# Allegro board NVR.brd
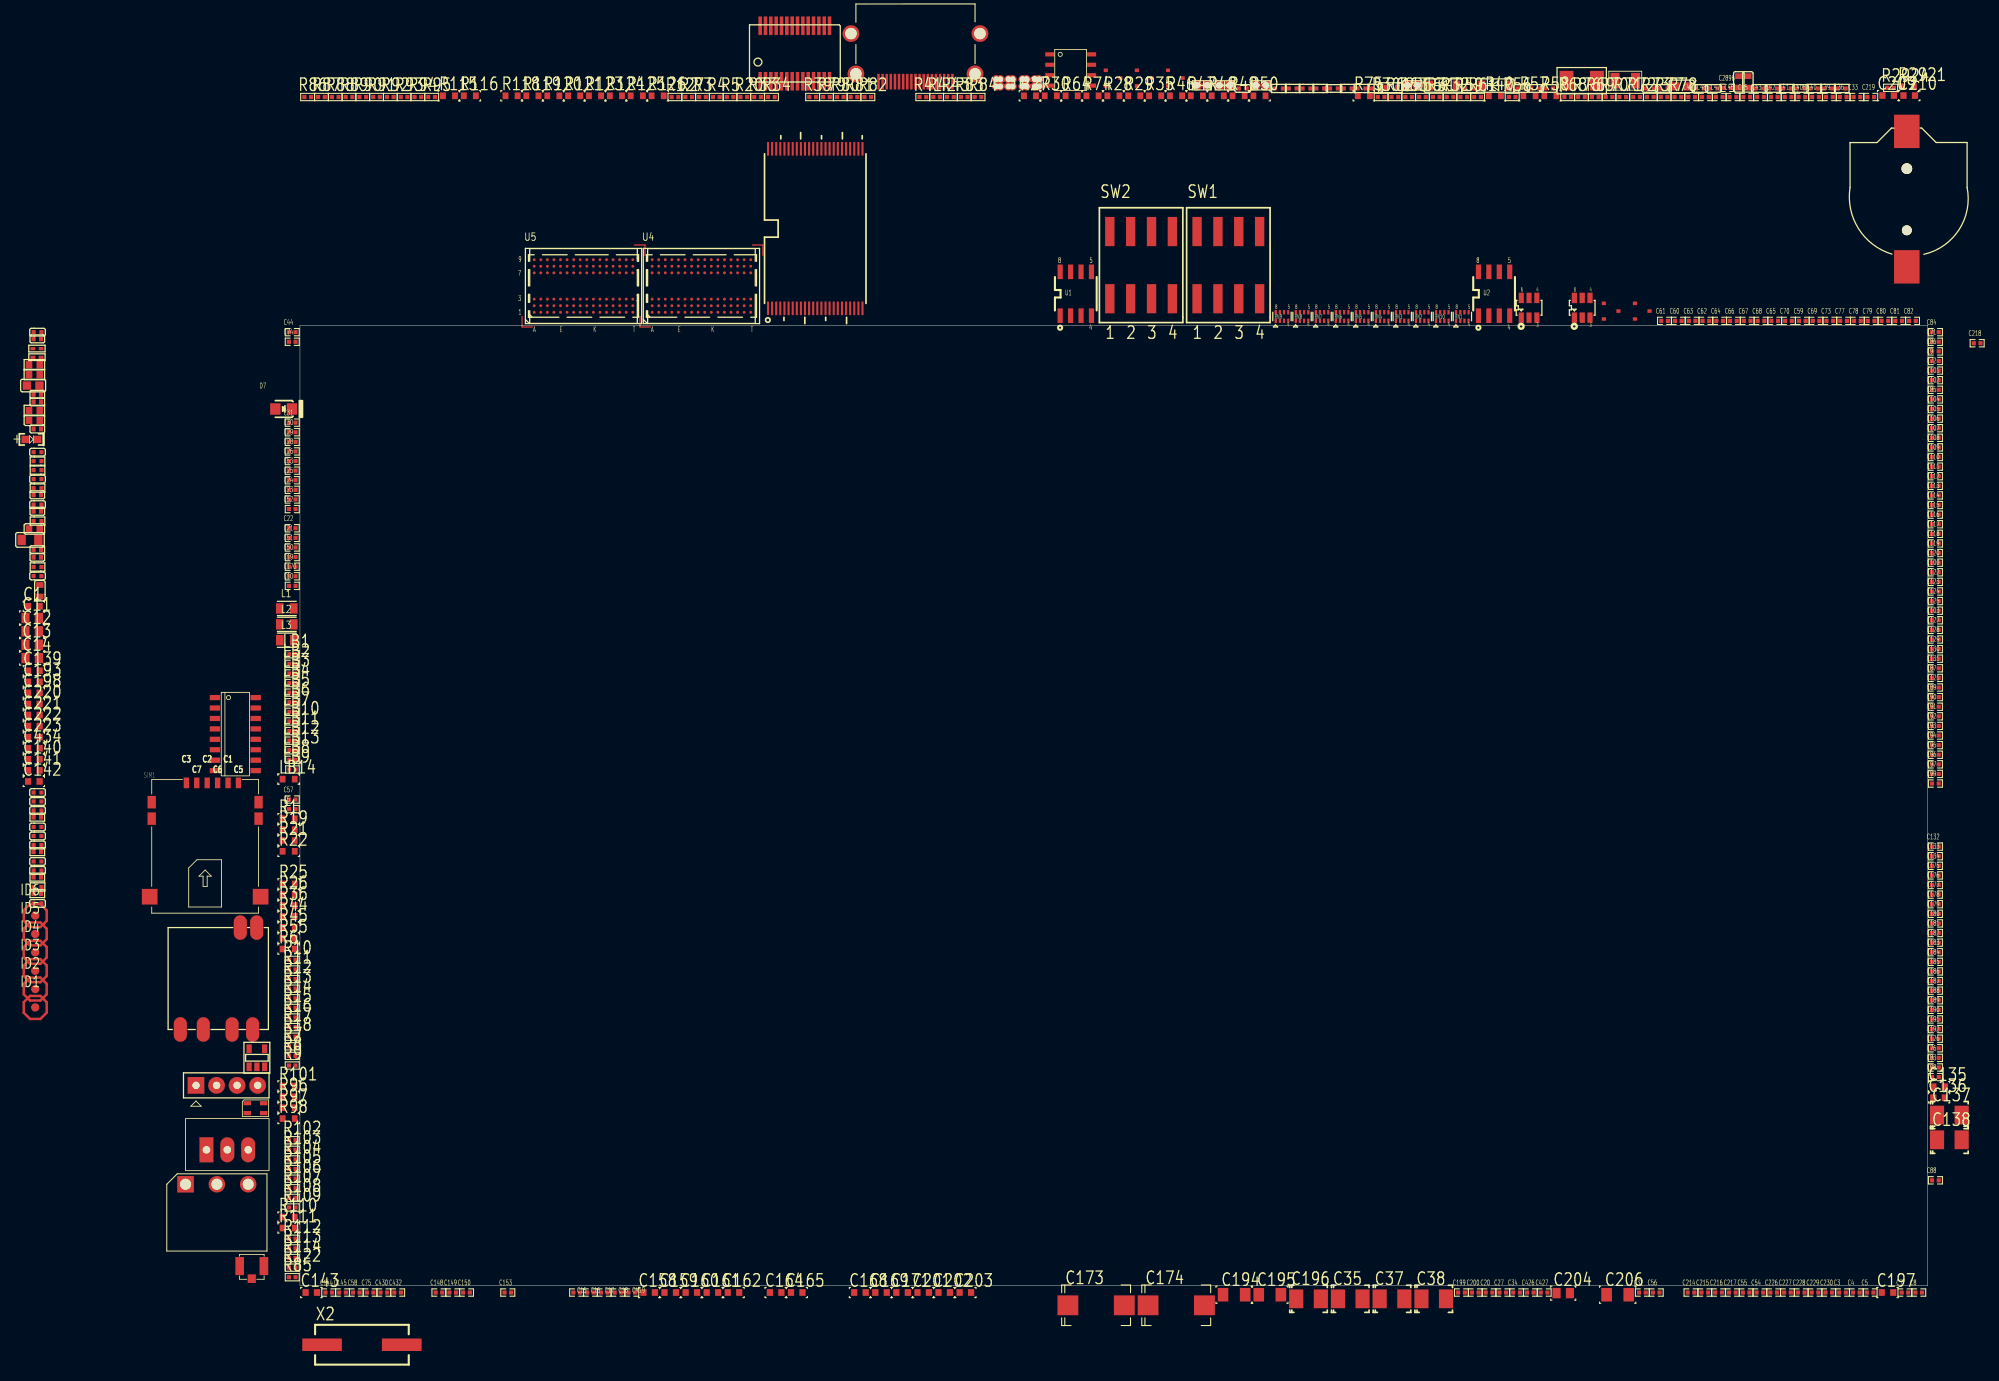
[diagram p0: board, top side]
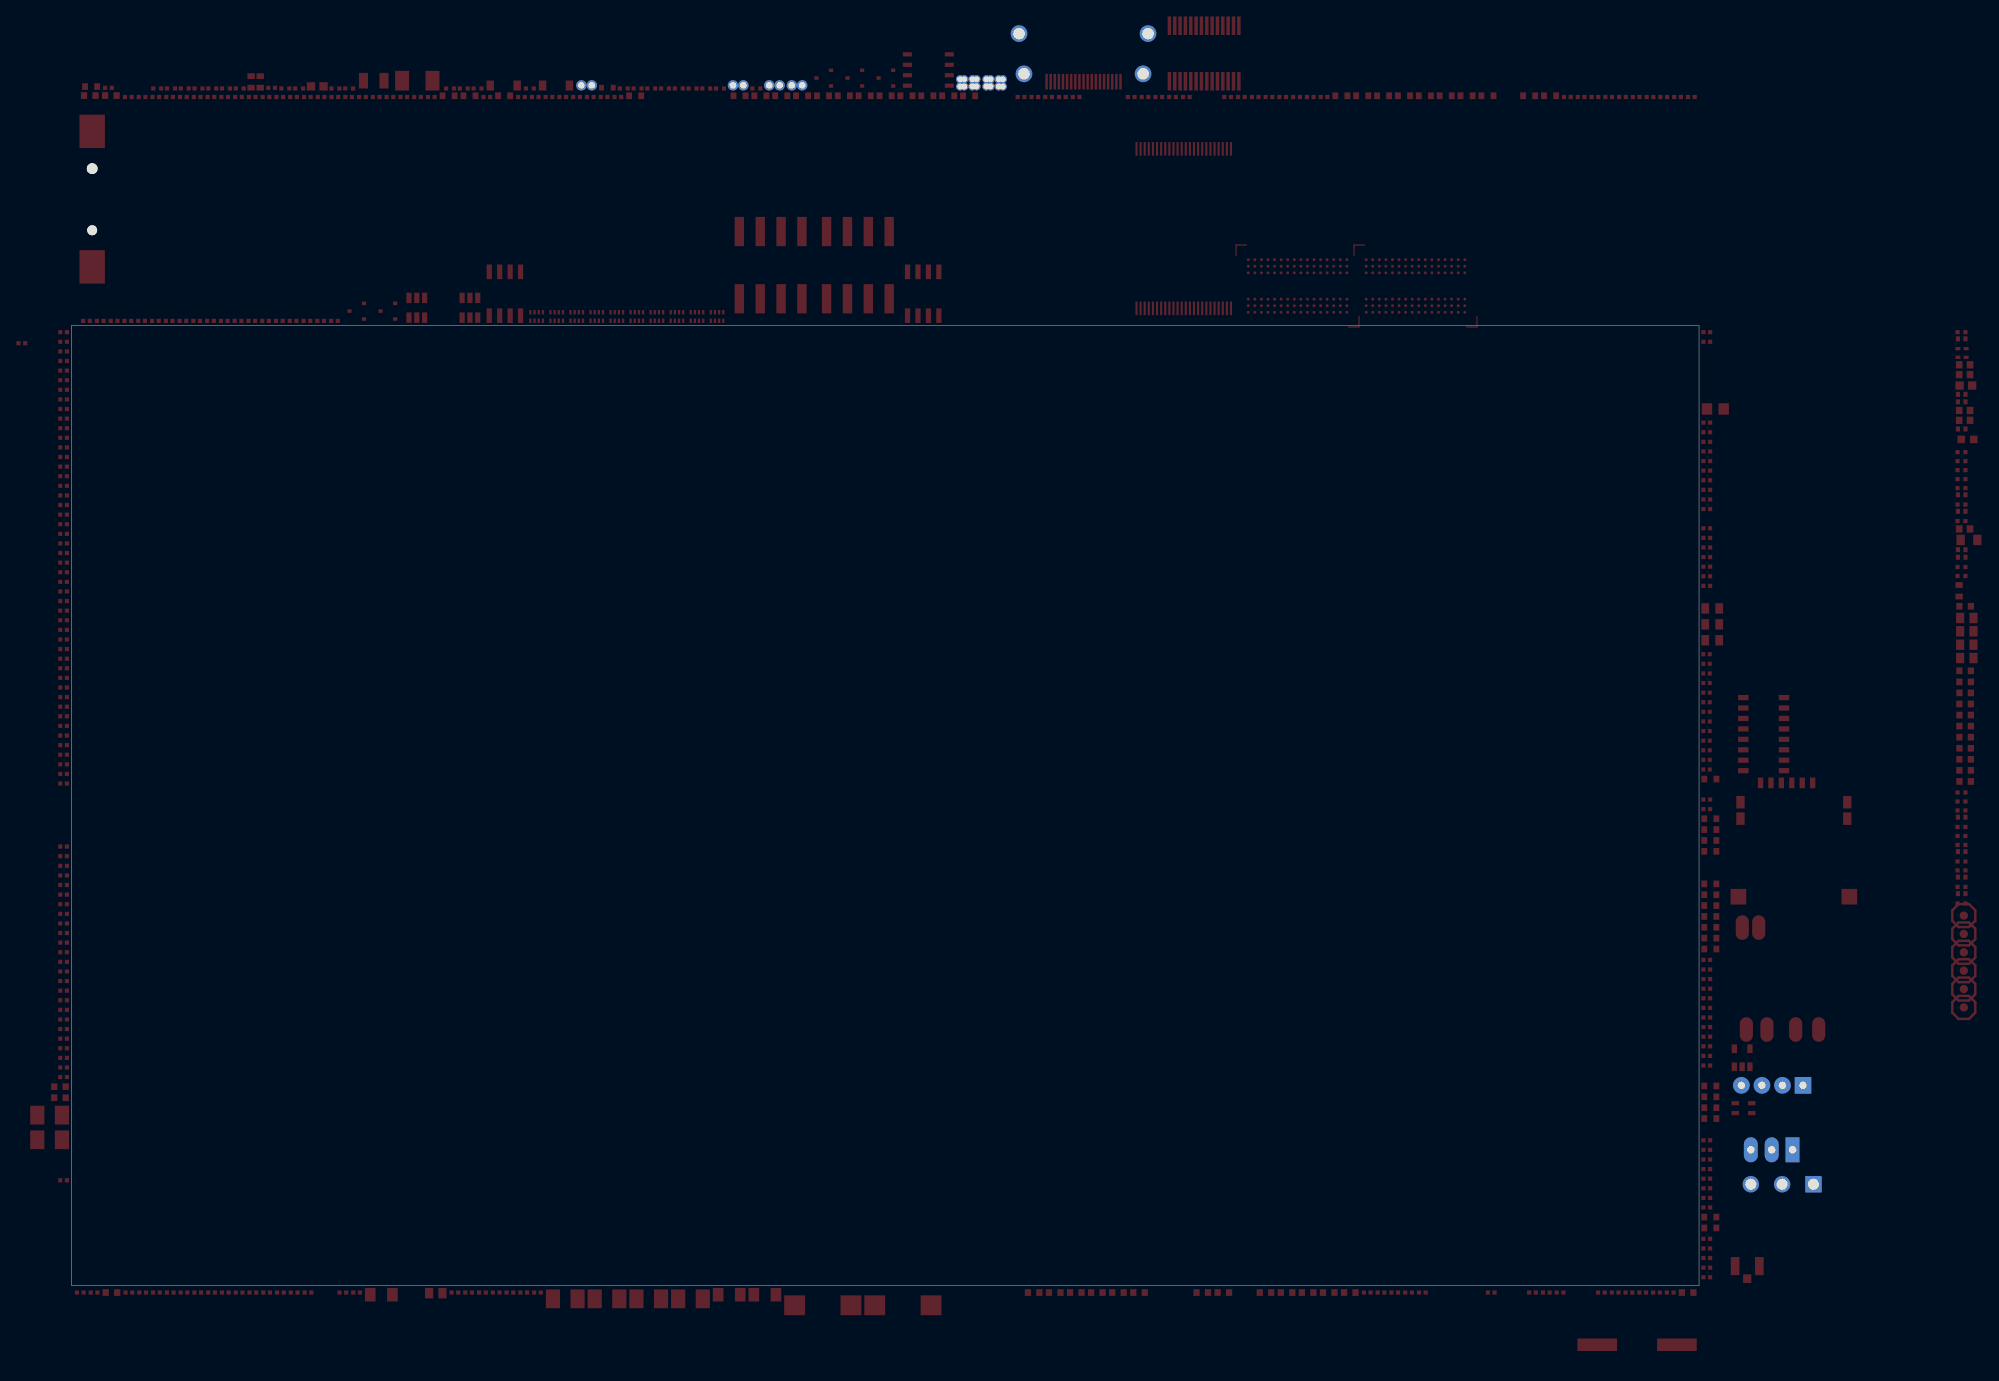
[diagram p1: board, bottom side, seen from below]

Outline 198.12 x 116.84 mm; copper layers: TOP, BOTTOM. Coordinates in mm from the lower left corner of the outline.
Outline path: 0,116.84 198.12,116.84 198.12,0 0,0 0,116.84

## Design rules (mm)
net group USB_D1: nets HUB_DM2 HUB_DP2
net group USB_HOST: nets USB2_DM0 USB2_DP0

## Placement (name value [footprint] x y rotation side)
BT1  BAT_3V  [BAT_CR1220]  195.58 132.08 0 top
C1  1NF  [SC0603]  -32.39 82.65 0 top
C3  220NF  [SC0402]  187.76 -0.84 0 top
C4  220NF  [SC0402]  189.43 -0.84 0 top
C5  220NF  [SC0402]  191.11 -0.84 0 top
C6  220NF  [SC0402]  -0.94 57.97 0 top
C7  220NF  [SC0402]  195.35 -0.84 0 top
C8  220NF  [SC0402]  197.03 -0.84 0 top
C9  100NF  [SC0402]  199.06 112.5 0 top
C10  100NF  [SC0402]  -0.94 85.13 0 top
C11  10UF  [SC0805]  -32.59 81.23 0 top
C12  10UF  [SC0805]  -32.59 79.6 0 top
C13  10UF  [SC0805]  -32.59 77.98 0 top
C14  10UF  [SC0805]  -32.59 76.35 0 top
C15  2.2UF  [HSC0402]  33.68 -0.84 0 top
C16  2.2UF  [HSC0402]  35.36 -0.84 0 top
C17  2.2UF  [HSC0402]  37.03 -0.84 0 top
C18  2.2UF  [HSC0402]  38.71 -0.84 0 top
C19  100NF  [SC0402]  -0.94 87.47 0 top
C20  100NF  [SC0402]  144.73 -0.84 0 top
C21  100NF  [SC0402]  -0.94 90.98 0 top
C22  100NF  [SC0402]  -0.94 92.14 0 top
C23  100NF  [SC0402]  -0.94 95.65 0 top
C24  100NF  [SC0402]  -0.94 96.82 0 top
C25  100NF  [SC0402]  -0.94 97.99 0 top
C26  100NF  [SC0402]  -0.94 100.32 0 top
C27  100NF  [SC0402]  146.41 -0.84 0 top
C28  100NF  [SC0402]  -0.94 101.49 0 top
C29  100NF  [SC0402]  -0.94 102.66 0 top
C30  100NF  [SC0402]  -0.94 103.83 0 top
C31  100NF  [SC0402]  -0.94 105 0 top
C32  100NF  [SC0402]  163.4 -0.84 0 top
C33  100NF  [SC0402]  189.51 144.61 0 top
C34  100NF  [SC0402]  148.08 -0.84 0 top
C35  100UF  [STC3528]  127.84 -1.6 0 top
C36  100NF  [SC0402]  187.83 144.61 0 top
C37  100UF  [STC3528]  132.92 -1.6 0 top
C38  100UF  [STC3528]  138 -1.6 0 top
C39  100NF  [SC0402]  186.16 144.61 0 top
C40  100NF  [SC0402]  184.48 144.61 0 top
C41  100NF  [SC0402]  181.13 144.61 0 top
C42  100NF  [SC0402]  179.45 144.61 0 top
C43  100NF  [SC0402]  177.77 144.61 0 top
C44  22PF  [SC0402]  -0.94 116 0 top
C45  100NF  [SC0402]  176.1 144.61 0 top
C46  100NF  [SC0402]  174.42 144.61 0 top
C47  100NF  [SC0402]  172.75 144.61 0 top
C48  100NF  [SC0402]  171.07 144.61 0 top
C49  100NF  [SC0402]  169.39 144.61 0 top
C50  100NF  [SC0402]  -0.94 88.64 0 top
C51  100NF  [SC0402]  -0.94 89.81 0 top
C52  100NF  [SC0402]  -0.94 94.48 0 top
C53  100NF  [SC0402]  -0.94 99.15 0 top
C54  100NF  [SC0402]  177.7 -0.84 0 top
C55  100NF  [SC0402]  176.02 -0.84 0 top
C56  100NF  [SC0402]  165.07 -0.84 0 top
C57  100NF  [SC0402]  -0.94 59.14 0 top
C58  100NF  [SC0402]  6.86 -0.84 0 top
C59  100NF  [SC0402]  182.86 117.37 0 top
C60  100NF  [SC0402]  167.77 117.37 0 top
C61  100NF  [SC0402]  166.09 117.37 0 top
C62  100NF  [SC0402]  171.12 117.37 0 top
C63  100NF  [SC0402]  169.45 117.37 0 top
C64  100NF  [SC0402]  172.8 117.37 0 top
C65  100NF  [SC0402]  179.5 117.37 0 top
C66  100NF  [SC0402]  174.48 117.37 0 top
C67  100NF  [SC0402]  176.15 117.37 0 top
C68  100NF  [SC0402]  177.83 117.37 0 top
C69  100NF  [SC0402]  184.53 117.37 0 top
C70  100NF  [SC0402]  181.18 117.37 0 top
C71  100NF  [SC0402]  199.06 114.83 0 top
C72  100NF  [SC0402]  199.06 111.33 0 top
C73  100NF  [SC0402]  186.21 117.37 0 top
C74  22PF  [SC0402]  -0.94 114.83 0 top
C75  1UF  [SC0402]  8.53 -0.84 0 top
C76  1UF  [SC0402]  199.06 27.71 0 top
C77  100NF  [SC0402]  187.89 117.37 0 top
C78  100NF  [SC0402]  189.56 117.37 0 top
C79  100NF  [SC0402]  191.24 117.37 0 top
C80  100NF  [SC0402]  192.92 117.37 0 top
C81  100NF  [SC0402]  194.59 117.37 0 top
C82  100NF  [SC0402]  196.27 117.37 0 top
C83  1UF  [SC0402]  199.06 26.54 0 top
C84  100NF  [SC0402]  199.06 116 0 top
C85  100NF  [SC0402]  199.06 107.82 0 top
C86  100NF  [SC0402]  199.06 113.66 0 top
C87  100NF  [SC0402]  199.06 73.94 0 top
C88  100NF  [SC0402]  199.06 12.81 0 top
C89  100NF  [SC0402]  199.06 71.6 0 top
C90  100NF  [SC0402]  199.06 70.43 0 top
C91  100NF  [SC0402]  199.06 69.27 0 top
C92  100NF  [SC0402]  199.06 68.1 0 top
C93  100NF  [SC0402]  199.06 66.93 0 top
C94  100NF  [SC0402]  199.06 65.76 0 top
C95  100NF  [SC0402]  199.06 64.59 0 top
C96  100NF  [SC0402]  199.06 63.42 0 top
C97  100NF  [SC0402]  199.06 62.26 0 top
C98  1UF  [SC0402]  199.06 25.37 0 top
C99  100NF  [SC0402]  199.06 61.09 0 top
C100  100NF  [SC0402]  199.06 86.79 0 top
C101  100NF  [SC0402]  199.06 110.16 0 top
C102  100NF  [SC0402]  199.06 108.99 0 top
C103  100NF  [SC0402]  199.06 80.95 0 top
C104  100NF  [SC0402]  199.06 106.65 0 top
C105  100NF  [SC0402]  199.06 105.49 0 top
C106  100NF  [SC0402]  199.06 104.32 0 top
C107  100NF  [SC0402]  199.06 103.15 0 top
C108  100NF  [SC0402]  199.06 101.98 0 top
C109  100NF  [SC0402]  199.06 100.81 0 top
C110  100NF  [SC0402]  199.06 99.64 0 top
C111  100NF  [SC0402]  199.06 98.48 0 top
C112  100NF  [SC0402]  199.06 97.31 0 top
C113  100NF  [SC0402]  199.06 96.14 0 top
C114  100NF  [SC0402]  199.06 94.97 0 top
C115  100NF  [SC0402]  199.06 93.8 0 top
C116  100NF  [SC0402]  199.06 92.63 0 top
C117  100NF  [SC0402]  199.06 91.47 0 top
C118  100NF  [SC0402]  199.06 90.3 0 top
C119  100NF  [SC0402]  199.06 89.13 0 top
C120  100NF  [SC0402]  199.06 87.96 0 top
C121  100NF  [SC0402]  199.06 72.77 0 top
C122  100NF  [SC0402]  199.06 85.62 0 top
C123  100NF  [SC0402]  199.06 84.45 0 top
C124  100NF  [SC0402]  199.06 83.29 0 top
C125  100NF  [SC0402]  199.06 82.12 0 top
C126  100NF  [SC0402]  199.06 28.88 0 top
C127  100NF  [SC0402]  199.06 79.78 0 top
C128  100NF  [SC0402]  199.06 78.61 0 top
C129  100NF  [SC0402]  199.06 77.44 0 top
C130  100NF  [SC0402]  199.06 76.28 0 top
C131  100NF  [SC0402]  199.06 75.11 0 top
C132  1UF  [SC0402]  199.06 53.42 0 top
C133  1UF  [SC0402]  199.06 52.25 0 top
C134  1UF  [SC0402]  199.06 51.08 0 top
C135  27PF  [SC0603]  199.5 24.21 0 top
C136  27PF  [SC0603]  199.5 22.86 0 top
C137  220UF  [STC3528]  200.76 20.75 0 top
C138  220UF  [STC3528]  200.76 17.75 0 top
C139  10UF  [SC0603]  -32.39 74.8 0 top
C140  2.2UF  [SC0603]  -32.39 64.03 0 top
C141  2.2UF  [SC0603]  -32.39 62.69 0 top
C142  2.2UF  [SC0603]  -32.39 61.34 0 top
C143  2.2UF  [SC0603]  1.38 -0.84 0 top
C144  100NF  [SC0402]  3.51 -0.84 0 top
C145  100NF  [SC0402]  5.18 -0.84 0 top
C148  10NF  [SC0402]  16.92 -0.84 0 top
C149  10NF  [SC0402]  18.59 -0.84 0 top
C150  10NF  [SC0402]  20.27 -0.84 0 top
C153  10NF  [SC0402]  25.3 -0.84 0 top
C158  100NF  [SC0603]  42.51 -0.84 0 top
C159  100NF  [SC0603]  45.07 -0.84 0 top
C160  100NF  [SC0603]  47.64 -0.84 0 top
C161  100NF  [SC0603]  50.2 -0.84 0 top
C162  100NF  [SC0603]  52.77 -0.84 0 top
C164  100NF  [SC0603]  57.9 -0.84 0 top
C165  100NF  [SC0603]  60.46 -0.84 0 top
C168  100NF  [SC0603]  68.16 -0.84 0 top
C169  100NF  [SC0603]  70.73 -0.84 0 top
C170  100NF  [SC0402]  -0.94 86.3 0 top
C171  10UF  [SC0603]  73.29 -0.84 0 top
C173  100UF  [STC7343]  96.9 -2.39 0 top
C174  100UF  [STC7343]  106.65 -2.39 0 top
C175  1UF  [SC0402]  199.06 49.91 0 top
C176  1UF  [SC0402]  199.06 48.74 0 top
C177  1UF  [SC0402]  199.06 47.57 0 top
C178  1UF  [SC0402]  199.06 46.41 0 top
C179  1UF  [SC0402]  199.06 45.24 0 top
C180  1UF  [SC0402]  199.06 44.07 0 top
C181  1UF  [SC0402]  199.06 42.9 0 top
C182  1UF  [SC0402]  199.06 41.73 0 top
C183  1UF  [SC0402]  199.06 40.56 0 top
C184  1UF  [SC0402]  199.06 39.4 0 top
C185  1UF  [SC0402]  199.06 38.23 0 top
C186  1UF  [SC0402]  199.06 37.06 0 top
C187  1UF  [SC0402]  199.06 35.89 0 top
C188  1UF  [SC0402]  199.06 34.72 0 top
C189  1UF  [SC0402]  199.06 33.55 0 top
C190  1UF  [SC0402]  199.06 32.39 0 top
C191  1UF  [SC0402]  199.06 31.22 0 top
C192  1UF  [SC0402]  199.06 30.05 0 top
C193  10UF  [SC0603]  -32.39 73.46 0 top
C194  22UF  [SC1206]  113.7 -1.1 0 top
C195  22UF  [SC1206]  118.05 -1.1 0 top
C196  100UF  [STC3528]  122.76 -1.6 0 top
C197  10UF  [SC0603]  193.23 -0.84 0 top
C198  10UF  [SC0603]  -32.39 72.11 0 top
C199  1NF  [SC0402]  141.38 -0.84 0 top
C200  1NF  [SC0402]  143.05 -0.84 0 top
C201  10UF  [SC0603]  75.86 -0.84 0 top
C202  10UF  [SC0603]  78.42 -0.84 0 top
C203  10UF  [SC0603]  80.99 -0.84 0 top
C204  10UF  [SC0805]  153.76 -0.91 0 top
C206  4.7UF  [SC1206]  160.39 -1.1 0 top
C209  10NF  [SC0603]  193.31 144.79 0 top
C210  10NF  [SC0603]  195.87 144.79 0 top
C214  15PF  [SC0402]  169.32 -0.84 0 top
C215  15PF  [SC0402]  170.99 -0.84 0 top
C216  15PF  [SC0402]  172.67 -0.84 0 top
C217  15PF  [SC0402]  174.35 -0.84 0 top
C218  15PF  [SC0402]  204.14 114.66 0 top
C219  15PF  [SC0402]  191.19 144.61 0 top
C220  10UF  [SC0603]  -32.39 70.77 0 top
C221  10UF  [SC0603]  -32.39 69.42 0 top
C222  10UF  [SC0603]  -32.39 68.07 0 top
C223  10UF  [SC0603]  -32.39 66.73 0 top
C224  0.1uF  [C0402]  -31.94 116 0 top
C226  10PF  [SC0402]  179.37 -0.84 0 top
C227  10PF  [SC0402]  181.05 -0.84 0 top
C228  10PF  [SC0402]  182.73 -0.84 0 top
C229  470NF  [SC0402]  184.4 -0.84 0 top
C230  470NF  [SC0402]  186.08 -0.84 0 top
C408  100NF  [SC0402]  182.8 144.61 0 top
C419  2.2UF  [HSC0402]  40.39 -0.84 0 top
C426  100NF  [SC0402]  149.76 -0.84 0 top
C427  100NF  [SC0402]  151.43 -0.84 0 top
C430  100NF  [SC0402]  10.21 -0.84 0 top
C432  100NF  [SC0402]  11.89 -0.84 0 top
C434  10UF  [SC0603]  -32.39 65.38 0 top
C1980  1uF  [C0402]  164.3 145.65 0 top
C1993  0.1uF  [C0402]  -31.94 46.5 0 top
C2035  0.1uF  [C0402]  -31.94 55.8 0 top
C2036  8pF  [C0402]  182.64 145.65 0 top
C2037  8pF  [C0402]  177.62 145.65 0 top
C2038  4.7uF  [C0603]  176.23 146.45 0 top
C2039  0.1uF  [C0402]  172.06 145.65 0 top
C2040  0.1uF  [C0402]  170.39 145.65 0 top
C2041  0.1uF  [C0402]  152.02 145.65 0 top
C2044  1uF  [C0402]  165.97 145.65 0 top
C2046  0.1uF  [C0402]  -31.94 57.81 0 top
C2049  0.1uF  [C0402]  -31.94 58.9 0 top
C2050  1uF  [C0402]  -31.94 60 0 top
C2051  4.7uF  [C0603]  -31.66 84.54 0 top
C2052  0.1uF  [C0402]  -31.94 86.33 0 top
C2053  8pF  [C0402]  148.67 145.65 0 top
C2054  8pF  [C0402]  125.85 145.65 0 top
C2094  1U  [C0402]  -31.94 98.12 0 top
C2095  1U  [C0402]  -31.94 101.4 0 top
C2096  1U  [C0402]  -31.94 50.51 0 top
C2097  1U  [C0402]  -31.94 53.62 0 top
C2173  1U  [C0402]  -31.94 54.71 0 top
C2174  22uF  [C0805]  -32.86 90.73 0 top
C2175  matching circuit, will be determined  [C0402]  -31.94 95.02 0 top
C2176  matching circuit, will be determined  [C0402]  -31.94 51.61 0 top
C2177  0.1uF  [SMC0402]  -31.97 96.22 0 top
C2178  10uF/6.3V  [SMC0603]  -32.33 92.06 0 top
C2179  33pF  [SMC0402]  -31.97 104.22 0 top
C2180  0.1uF  [SMC0402]  -31.97 108.44 0 top
C2181  0.1uF  [SMC0402]  -31.97 88.62 0 top
C2182  10uF/6.3V  [SMC0603]  -32.33 105.28 0 top
C2183  33pF  [SMC0402]  -31.97 94.21 0 top
C2184  0.1uF  [SMC0402]  -31.97 115.19 0 top
C2185  0.1uF  [SMC0402]  -31.97 89.54 0 top
C2186  33pF  [SMC0402]  -31.97 107.53 0 top
C2187  0.1uF  [C0402]  114.74 145.65 0 top
C2896  100NF  [SC0402]  173.74 145.73 0 top
C2897  1uF  [C0402]  179.29 145.65 0 top
C2898  0.1uF  [C0402]  150.35 145.65 0 top
C2899  4.7uF  [C0603]  175.13 146.45 0 top
D2  1N5819  [SOD123]  145.49 146.01 0 top
D4  NC/1N5819  [SOD123]  139.12 146.01 0 top
D7  LED  [SD0805-LED]  -1.98 106.66 0 top
D49  1N4148  [SOD523]  132.87 145.75 0 top
ED15  NC/ESD9B5VL  [E0402N]  135.41 146.03 0 top
ED16  NC/ESD9B5VL  [E0402N]  116.95 146.03 0 top
ED17  NC/ESD9B5VL  [E0402N]  112.54 146.03 0 top
ED18  NC/ESD9B5VL  [E0402N]  109.79 146.03 0 top
ESD811  ES0402V014BT  [ESD0402]  -32.01 112.96 0 top
ESD812  ES0402V014BT  [ESD0402]  -32.01 114.01 0 top
FB3  BLM18PG181SN1  [L0603]  168.18 145.9 0 top
FB5  BLM18PG181SN1  [L0603]  -32.48 109.51 0 top
FB10  31/3A-L3  [SMR0603]  -32.33 112.03 0 top
FB1605  31/3A-L3  [SMR0603]  -32.33 106.47 0 top
FB1606  31/3A-L3  [SMR0603]  -32.33 110.84 0 top
ID1  -  [ID-BOARD]  -32.22 33.85 0 top
ID2  -  [ID-BOARD]  -32.22 36.08 0 top
ID3  -  [ID-BOARD]  -32.22 38.32 0 top
ID4  -  [ID-BOARD]  -32.22 40.55 0 top
ID5  -  [ID-BOARD]  -32.22 42.79 0 top
ID6  -  [ID-BOARD]  -32.22 45.03 0 top
J21  CON3  [ANTENNA_WIFI]  -5.86 2.38 0 top
J0701  DEBUG  [CONN3_BOX]  -10.11 16.53 0 top
J0702  691322310003  [PHEONIX_CONN_3]  -13.92 12.34 0 top
J1851  HEADER 4 2.54mm /NC  [HEADER-4]  -12.65 24.37 0 top
J1852  10029449-111RLF  [HDMI_A]  70.42 146.48 0 top
L1  100NH  [SL0805B]  -1.6 82.39 0 top
L2  100NH  [SL0805B]  -1.6 80.46 0 top
L3  100NH  [SL0805B]  -1.6 78.52 0 top
L14  matching circuit,will be determined  [R0402]  -31.94 93.02 0 top
LB1  LB  [SL0402]  -0.91 76.82 0 top
LB2  LB  [SL0402]  -0.91 75.65 0 top
LB3  LB  [SL0402]  -0.91 74.48 0 top
LB4  LB  [SL0402]  -0.91 73.31 0 top
LB5  LB  [SL0402]  -0.91 72.15 0 top
LB6  LB  [SL0402]  -0.91 70.98 0 top
LB7  LB  [SL0402]  -0.91 69.81 0 top
LB8  LB  [SL0402]  -0.91 63.97 0 top
LB9  LB  [SL0402]  -0.91 62.8 0 top
LB10  LB  [SL0402]  -0.91 68.64 0 top
LB11  LB  [SL0402]  -0.91 67.47 0 top
LB12  LB  [SL0402]  -0.91 66.3 0 top
LB13  LB  [SL0402]  -0.91 65.13 0 top
LB14  LB  [SL0603]  -1.37 61.63 0 top
LED1  LED0603-G  [SM0603LED_AC]  -32.68 102.95 0 top
Q2  FETN-GSD  [SOT23]  159.59 118.57 0 top
Q3  FETN-GSD  [SOT23]  163.38 118.57 0 top
Q6  WNM2021/2SK3018  [SOT23]  106.54 146.92 0 top
Q7  WNM2021/2SK3018  [SOT23]  102.76 146.92 0 top
Q8  NC/WNM2021/2SK3018  [SOT23]  98.97 146.92 0 top
R1  10K  [SR0603]  -1.37 56.8 0 top
R2  120  [SR0402]  47.32 144.61 0 top
R3  120  [SR0402]  49 144.61 0 top
R4  120  [SR0402]  50.67 144.61 0 top
R5  120  [SR0402]  52.35 144.61 0 top
R6  10K  [SR0603]  -1.37 40.95 0 top
R7  33  [SR0402]  -0.94 29.12 0 top
R8  33  [SR0402]  -0.94 27.95 0 top
R9  33  [SR0402]  -0.94 26.78 0 top
R10  33  [SR0402]  -0.94 39.63 0 top
R11  33  [SR0402]  -0.94 38.46 0 top
R12  33  [SR0402]  -0.94 37.3 0 top
R13  33  [SR0402]  -0.94 36.13 0 top
R14  33  [SR0402]  -0.94 34.96 0 top
R15  33  [SR0402]  -0.94 33.79 0 top
R16  33  [SR0402]  -0.94 32.62 0 top
R17  33  [SR0402]  -0.94 31.45 0 top
R18  33  [SR0402]  -0.94 30.29 0 top
R19  10K  [SR0603]  -1.37 55.48 0 top
R20  1K  [SR0402]  54.03 144.61 0 top
R21  10K  [SR0603]  -1.37 54.16 0 top
R22  10K  [SR0603]  -1.37 52.84 0 top
R25  10K  [SR0603]  -1.37 48.88 0 top
R26  10K  [SR0603]  -1.37 47.56 0 top
R27  4.7K/NC  [SR0603]  88.85 144.76 0 top
R28  4.7K  [SR0603]  99.01 144.76 0 top
R29  4.7K  [SR0603]  101.55 144.76 0 top
R30  4.7K/NC  [SR0603]  91.39 144.76 0 top
R31  0  [SR0402]  138.3 144.61 0 top
R32  0  [SR0402]  139.98 144.61 0 top
R33  1K  [SR0402]  55.7 144.61 0 top
R34  1K  [SR0402]  57.38 144.61 0 top
R35  4.7K  [SR0603]  104.09 144.76 0 top
R36  10K  [SR0603]  -1.37 46.24 0 top
R39  1K  [SR0402]  62.41 144.61 0 top
R40  1.13K  [SR0603]  145.44 144.76 0 top
R41  10K  [SR0402]  75.82 144.61 0 top
R42  10K  [SR0402]  77.5 144.61 0 top
R43  10K  [SR0402]  79.17 144.61 0 top
R44  10K  [SR0603]  -1.37 44.92 0 top
R45  10K  [SR0603]  -1.37 43.6 0 top
R46  4.7K  [SR0603]  106.63 144.76 0 top
R47  4.7K  [SR0603]  109.17 144.76 0 top
R48  4.7K  [SR0603]  111.71 144.76 0 top
R49  4.7K  [SR0603]  114.25 144.76 0 top
R50  4.7K  [SR0603]  116.79 144.76 0 top
R55  10K  [SR0603]  -1.37 42.27 0 top
R56  1MEG  [SR0402]  147.55 144.61 0 top
R57  270  [SR0603]  149.66 144.76 0 top
R58  270  [SR0603]  152.2 144.76 0 top
R59  0  [SR0402]  141.66 144.61 0 top
R61  0  [SR0402]  143.33 144.61 0 top
R62  75  [SR0402]  133.27 144.61 0 top
R63  75  [SR0402]  134.95 144.61 0 top
R64  4.7K/NC  [SR0603]  93.93 144.76 0 top
R66  75  [SR0402]  136.63 144.61 0 top
R68  33K/NC  [SR0402]  154.31 144.61 0 top
R69  10K  [SR0402]  157.66 144.61 0 top
R70  20K  [SR0402]  159.33 144.61 0 top
R71  240  [SR0402]  161.01 144.61 0 top
R72  240  [SR0402]  162.69 144.61 0 top
R73  240  [SR0402]  164.36 144.61 0 top
R74  4.7K/NC  [SR0603]  96.47 144.76 0 top
R75  4.7K  [SR0603]  129.49 144.76 0 top
R76  33K/NC  [SR0402]  155.98 144.61 0 top
R77  4.7K  [SR0402]  166.04 144.61 0 top
R78  470K  [SR0402]  167.72 144.61 0 top
R79  1K  [SR0402]  64.08 144.61 0 top
R80  1K  [SR0402]  65.76 144.61 0 top
R81  1K  [SR0402]  67.44 144.61 0 top
R82  1K  [SR0402]  69.11 144.61 0 top
R83  10K  [SR0402]  80.85 144.61 0 top
R84  10K  [SR0402]  82.52 144.61 0 top
R85  22  [SR0402]  -0.94 1.03 0 top
R86  22  [SR0402]  0.94 144.61 0 top
R87  22  [SR0402]  2.62 144.61 0 top
R88  22  [SR0402]  4.29 144.61 0 top
R89  22  [SR0402]  5.97 144.61 0 top
R90  22  [SR0402]  7.65 144.61 0 top
R91  22  [SR0402]  9.32 144.61 0 top
R92  22  [SR0402]  11 144.61 0 top
R93  22  [SR0402]  12.67 144.61 0 top
R94  22  [SR0402]  14.35 144.61 0 top
R95  22  [SR0402]  16.03 144.61 0 top
R96  100K  [SR0603]  -1.37 22.97 0 top
R97  100K  [SR0603]  -1.37 21.65 0 top
R98  100K  [SR0603]  -1.37 20.33 0 top
R101  100K  [SR0603]  -1.37 24.29 0 top
R102  1K  [SR0402]  -0.94 17.69 0 top
R103  1K  [SR0402]  -0.94 16.52 0 top
R104  1K  [SR0402]  -0.94 15.35 0 top
R105  1K  [SR0402]  -0.94 14.18 0 top
R106  1K  [SR0402]  -0.94 13.01 0 top
R107  1K  [SR0402]  -0.94 11.85 0 top
R108  1K  [SR0402]  -0.94 10.68 0 top
R109  1K  [SR0402]  -0.94 9.51 0 top
R110  2K  [SR0603]  -1.37 8.34 0 top
R111  2K  [SR0603]  -1.37 7.02 0 top
R112  22  [SR0402]  -0.94 5.7 0 top
R113  22  [SR0402]  -0.94 4.53 0 top
R114  22  [SR0402]  -0.94 3.36 0 top
R115  0/NC  [SR0603]  18.14 144.76 0 top
R116  0/NC  [SR0603]  20.68 144.76 0 top
R118  0  [SR0603]  25.76 144.76 0 top
R119  0  [SR0603]  28.3 144.76 0 top
R120  0  [SR0603]  30.84 144.76 0 top
R121  0  [SR0603]  33.38 144.76 0 top
R122  22  [SR0402]  -0.94 2.19 0 top
R123  1K  [SR0603]  35.92 144.76 0 top
R124  1K  [SR0603]  38.46 144.76 0 top
R125  200  [SR0603]  41 144.76 0 top
R126  200  [SR0603]  43.54 144.76 0 top
R127  10  [SR0402]  45.64 144.61 0 top
R301  75  [SR0402]  131.6 144.61 0 top
R2290  10K  [R0402]  120.83 145.65 0 top
R2291  10K  [R0402]  -31.94 100.31 0 top
R2321  0R  [R0402]  -31.94 99.22 0 top
R2375  0R  [R0402]  -31.94 48.51 0 top
R2376  0R  [R0402]  -31.94 97.03 0 top
R2377  10K  [R0402]  119.16 145.65 0 top
R2378  100K  [R0402]  124.18 145.65 0 top
R2379  10K  [R0402]  122.51 145.65 0 top
R2380  10K  [R0402]  185.99 145.65 0 top
R2385  0R/NC  [R0402]  -31.94 87.43 0 top
R2386  0R  [SMR0402]  -31.97 52.8 0 top
R2387  0R/NM  [SMR0402]  -31.97 49.7 0 top
R2388  0R/NM  [SMR0402]  -31.97 57 0 top
R2389  240R  [SMR0402]  -31.97 47.69 0 top
R2917  1.62K%1  [R0402]  127.53 145.65 0 top
R2918  1.62K%1  [R0402]  129.2 145.65 0 top
R2919  1.62K%1  [R0402]  130.87 145.65 0 top
R2920  1.62K%1  [R0402]  187.66 145.65 0 top
R2921  0/NC  [SR0603]  195.71 145.88 0 top
R2922  NC/10K  [R0402]  180.97 145.65 0 top
R2923  NC/10K  [R0402]  184.31 145.65 0 top
R2924  47K  [SR0402]  193.6 145.73 0 top
R2925  680R  [R0402]  142.31 145.65 0 top
RN1  33  [SRN8-0804]  141.48 117.91 0 top
RN2  33  [SRN8-0804]  136.6 117.91 0 top
RN3  33  [SRN8-0804]  134.16 117.91 0 top
RN4  33  [SRN8-0804]  131.72 117.91 0 top
RN5  33  [SRN8-0804]  129.29 117.91 0 top
RN6  33  [SRN8-0804]  126.85 117.91 0 top
RN7  33  [SRN8-0804]  124.41 117.91 0 top
RN8  33  [SRN8-0804]  121.97 117.91 0 top
RN9  33  [SRN8-0804]  119.53 117.91 0 top
RN10  33  [SRN8-0804]  139.04 117.91 0 top
SIM1  CR-201-6P  [MICRO_SIM]  -11.29 54.82 0 top
SW1  DSW4  [SDSW8-L]  113 124.16 0 top
SW2  DSW4  [SDSW8-L]  102.38 124.16 0 top
T2  DLW21SN900SQ2L  [CHOKE_COIL]  -5.41 21.79 0 top
U1  MIC2505  [SOP8-50-150]  94.43 120.68 0 top
U2  MIC2505  [SOP8-50-150]  145.34 120.68 0 top
U4  DDR3 DRAM-4GBIT-800MHZ-16BIT  [BGA96-32-1609G]  48.87 121.62 0 top
U5  DDR3 DRAM-4GBIT-800MHZ-16BIT  [BGA96-32-1609G]  34.51 121.62 0 top
U8  AZC199-04S  [SOT23-6L]  149.6 118.97 0 top
U10  H27U2G8F2CTR_BC  [SOP48-20-720A]  62.72 128.6 0 top
U16  AZC199-04S  [SOT23-6L]  156.07 118.97 0 top
U26  PT5108E23E-33/RT9013-33B  [SOT23-5]  -5.24 27.73 0 top
U28  RL-UM12BS-8188EUS  [WIFI_BT_R]  -9.56 37.36 0 top
U81  MCP7940M-I/SN  [SOIC-8]  93.81 147.9 0 top
U83  MAX3232  [SOIC16]  -7.87 67.1 0 top
U90  NC/RClamp0524PA/ESD5304/TPD4E02B04DQAR  [SLP2510P8]  88.94 146.33 0 top
U91  NC/RClamp0524PA/ESD5304/TPD4E02B04DQAR  [SLP2510P8]  85.74 146.33 0 top
U92  GL850G  [SSOP28]  60.24 149.9 0 top
X2  24MHZ  [SX2-1205]  7.54 -7.19 0 top
X3  12M/20pF  [5032-12M]  156.01 146.6 0 top
Y6  32.768K  [CM315D]  161.31 146.6 0 top

## Library data of the parts
BT1 = CON2
C1 C3-C19 C21-C26 C28-C33 C36 C39-C86 C98 C132-C136 C139-C145 C148-C150 C153 C158-C162 C164 C165 C168-C171 C175-C195 C197-C204 C206 C209 C210 C214-C223 C226-C230 C408 C419 C430 C432 C434 C2094-C2097 C2173 C2896 = C
C20 C27 C34 C87-C97 C99-C131 C426 C427 = C: alternate symbols: ((T:SC0402;B:SC0402,SC0402-BGA,SC0402-BGA-A))
C35 C37 C38 C137 C138 C173 C174 C196 = CP
C224 C1980 C1993 C2035 C2046 C2051-C2054 C2174 = CAP NP
C2036 C2037 C2039-C2041 C2898 = CAPACITOR
C2038 C2897 C2899 = CAPACITOR_0
C2044 C2050 = CAP NP: room: USB+5V
C2049 = CAP NP_4
C2175 C2176 = C0603
C2177 C2180 C2181 C2185 = CAPC-SM0402_10: tolerance: 10%
C2178 C2182 = CAPC-SM0805_0
C2179 C2183 C2184 C2186 = CAPC-SM0402_4: room: ROOM10
C2187 = CAP NP_2
D2 D4 = DIODE: room: CHG
D7 = LED
D49 = DIODE_0
ED15-ED18 = TVS
ESD811 ESD812 = ESD,ES0402V014BT_2
FB3 FB5 = INDUCTOR
FB10 FB1605 FB1606 = FB0603_0: room: ROOM9
ID1-ID6 = ID-BOARD
J21 = CON3
J0701 J0702 = HEADER 3
J1851 = HEADER 4
J1852 = HDMI_A
L1-L3 = L
L14 = INDUCTOR_0
LB1-LB14 = LB
LED1 = LED_LTST-C150GKT_0
Q2 Q3 = FETN-GSD
Q6-Q8 = MOSFET N
R1-R22 R25-R36 R39-R50 R55-R59 R61-R64 R66 R68-R71 R74-R98 R101 R110-R116 R118-R127 R301 R2921 R2924 = R
R72 R73 R102-R109 = R: alternate symbols: ((T:SR0402;B:SR0402,SR0402-BGA))
R2290 = RESISTOR_4
R2291 R2321 R2375 R2376 R2386-R2389 = RES-SM0402_2
R2377-R2379 R2385 R2917-R2920 R2922 R2923 R2925 = RESISTOR
R2380 = RESISTOR_1
RN1-RN10 = RND8-4
SIM1 = SIM_RIDER_2
SW1 SW2 = DSW4
T2 = TRNSFMR 67115100_0
U1 U2 = MIC2505
U4 U5 = MT41J64M16LA-15E_0
U8 U16 = AZC199-04S
U10 = MT29F2G08ABAEAWP_0
U26 = DS8008_4
U28 = WM-294_0
U81 = LM4990_0
U83 = MAX3232_1: Tolerance: ***; User Part Number: ***
U90 = DS8008_1
U91 = DS8008_2
U92 = GLI8024-48_3
X2 = X3
X3 Y6 = CRYSTAL DIP DT38 R_2.A

## Footprints (pads in the part's own frame, mm; a bottom-side part is the same pattern mirrored in y, then rotated)
5032-12M
  rect 1.7x2.4 smd: 1(-1.85,0) 2(1.85,0)
ANTENNA_WIFI
  rect 1.05x2.2 smd: 1(-1.475,0) 2(1.475,0)
  rect 1x1.05 smd: 3(0,-1.525)
BAT_CR1220
  round 1.3 hole 1.3 unplated: (0,3.815)
  round 1.2 hole 1.2 unplated: (0,-3.685)
  rect 3.099x4.064 smd: 1(0,8.348) 2(0,-8.134)
BGA96-32-1609G
  round 0.356 smd: A1(-6,-3.2) A2(-6,-2.4) A3(-6,-1.6) A7(-6,1.6) A8(-6,2.4) A9(-6,3.2) B1(-5.2,-3.2) B2(-5.2,-2.4) B3(-5.2,-1.6) B7(-5.2,1.6) B8(-5.2,2.4) B9(-5.2,3.2) C1(-4.4,-3.2) C2(-4.4,-2.4) C3(-4.4,-1.6) C7(-4.4,1.6) C8(-4.4,2.4) C9(-4.4,3.2) D1(-3.6,-3.2) D2(-3.6,-2.4) D3(-3.6,-1.6) D7(-3.6,1.6) D8(-3.6,2.4) D9(-3.6,3.2) E1(-2.8,-3.2) E2(-2.8,-2.4) E3(-2.8,-1.6) E7(-2.8,1.6) E8(-2.8,2.4) E9(-2.8,3.2) F1(-2,-3.2) F2(-2,-2.4) F3(-2,-1.6) F7(-2,1.6) F8(-2,2.4) F9(-2,3.2) G1(-1.2,-3.2) G2(-1.2,-2.4) G3(-1.2,-1.6) G7(-1.2,1.6) G8(-1.2,2.4) G9(-1.2,3.2) H1(-0.4,-3.2) H2(-0.4,-2.4) H3(-0.4,-1.6) H7(-0.4,1.6) H8(-0.4,2.4) H9(-0.4,3.2) J1(0.4,-3.2) J2(0.4,-2.4) J3(0.4,-1.6) J7(0.4,1.6) J8(0.4,2.4) J9(0.4,3.2) K1(1.2,-3.2) K2(1.2,-2.4) K3(1.2,-1.6) K7(1.2,1.6) K8(1.2,2.4) K9(1.2,3.2) L1(2,-3.2) L2(2,-2.4) L3(2,-1.6) L7(2,1.6) L8(2,2.4) L9(2,3.2) M1(2.8,-3.2) M2(2.8,-2.4) M3(2.8,-1.6) M7(2.8,1.6) M8(2.8,2.4) M9(2.8,3.2) N1(3.6,-3.2) N2(3.6,-2.4) N3(3.6,-1.6) N7(3.6,1.6) N8(3.6,2.4) N9(3.6,3.2) P1(4.4,-3.2) P2(4.4,-2.4) P3(4.4,-1.6) P7(4.4,1.6) P8(4.4,2.4) P9(4.4,3.2) R1(5.2,-3.2) R2(5.2,-2.4) R3(5.2,-1.6) R7(5.2,1.6) R8(5.2,2.4) R9(5.2,3.2) T1(6,-3.2) T2(6,-2.4) T3(6,-1.6) T7(6,1.6) T8(6,2.4) T9(6,3.2)
C0402
  rect 0.51x0.51 smd: 1(-0.48,0) 2(0.48,0)
C0603
  rect 0.9x0.7 smd: 1(0,0.7) 2(0,-0.7)
C0805
  rect 1.016x1.27 smd: 1(-1.016,0) 2(1.016,0)
CHOKE_COIL
  rect 0.914x0.508 smd: 1(-1,0.4) 2(1,0.4) 3(1,-0.8) 4(-1,-0.8)
CM315D
  rect 1.1x1.9 smd: 1(-1.25,0) 2(1.25,0)
CONN3_BOX
  rect 1.7x3.048 hole 0.9: 1(-1.27,0)
  oval 1.7x3.048 hole 0.9: 2(1.27,0) 3(3.81,0)
E0402N
  oval 1.27x1.27 hole 0.8: 1(-0.635,0) 2(0.635,0)
ESD0402
  custom 0.6x0.4 smd: 1(-0.495,-0.013)
  custom 0.602x0.403 smd: 2(0.505,-0.013)
HDMI_A
  rect 0.305x1.905 smd: 1(0,0) 2(0.5,0) 3(1,0) 4(1.5,0) 5(2,0) 6(2.5,0) 7(3,0) 8(3.5,0) 9(4,0) 10(4.5,0) 11(5,0) 12(5.5,0) 13(6,0) 14(6.5,0) 15(7,0) 16(7.5,0) 17(8,0) 18(8.5,0) 19(9,0)
  round 2.032 hole 1.397: 20(11.75,0.953) 21(-2.75,0.953) 22(-3.35,5.852) 23(12.35,5.852)
HEADER-4
  rect 2.032x2.032 hole 0.889: 1(0,0)
  round 2.032 hole 0.889: 2(2.5,0) 3(5,0) 4(7.5,0)
HSC0402
  rect 0.508x0.508 smd: 1(-0.406,0) 2(0.406,0)
ID-BOARD
  round 1.016 smd: 1(0,0)
L0603
  rect 1.016x1.016 smd: 1(-0.762,0) 2(0.762,0)
MICRO_SIM
  rect 0.65x1.3 smd: 1(2.54,6.35) 2(0,6.35) 3(-2.54,6.35) 5(3.81,6.35) 6(1.27,6.35) 7(-1.27,6.35)
  rect 1.016x1.524 smd: 9(-6.75,4) 10(-6.75,2) 11(6.25,2) 12(6.25,4)
  rect 1.905x1.905 smd: 13(-7,-7.5) 14(6.5,-7.5)
PHEONIX_CONN_3
  rect 2x2 hole 1.33: 1(0,0)
  round 2 hole 1.33: 2(3.81,0) 3(7.62,0)
R0402
  rect 0.51x0.51 smd: 1(-0.48,0) 2(0.48,0)
SC0402
  rect 0.508x0.508 smd: 1(-0.406,0) 2(0.406,0)
SC0603
  rect 0.762x0.813 smd: 1(-0.699,0) 2(0.699,0)
SC0805
  rect 0.991x1.27 smd: 1(-0.813,0) 2(0.813,0)
SC1206
  rect 1.295x1.651 smd: 1(-1.346,0) 2(1.346,0)
SD0805-LED
  rect 1.27x1.397 smd: 1(-1.016,0) 2(1.016,0)
SDSW8-L
  rect 1.143x3.556 smd: 1(-3.81,-4.089) 2(-1.27,-4.089) 3(1.27,-4.089) 4(3.81,-4.089) 5(3.81,4.089) 6(1.27,4.089) 7(-1.27,4.089) 8(-3.81,4.089)
SL0402
  rect 0.483x0.508 smd: 1(-0.394,0) 2(0.394,0)
SL0603
  rect 0.711x0.813 smd: 1(-0.74,0) 2(0.74,0)
SL0805B
  rect 0.94x1.27 smd: 1(-0.851,0) 2(0.851,0)
SLP2510P8
  oval 1x1 hole 0.7: 1(-1,-0.437) 2(-0.5,-0.437) 4(0.5,-0.437) 5(1,-0.437) 6(1,0.437) 7(0.5,0.437) 9(-0.5,0.437) 10(-1,0.437)
  rect 0.51x0.51 smd: 3(0,-0.388) 8(0,0.388)
SM0603LED_AC
  rect 0.914x0.914 smd: A(-0.762,0) C(0.762,0)
SMC0402
  rect 0.508x0.61 smd: 1(-0.457,0) 2(0.457,0)
SMC0603
  rect 0.813x0.889 smd: 1(-0.66,0) 2(0.66,0)
SMR0402
  rect 0.508x0.61 smd: 1(-0.457,0) 2(0.457,0)
SMR0603
  rect 0.813x0.889 smd: 1(-0.66,0) 2(0.66,0)
SOD123
  rect 0.91x1.22 smd: 1(1.635,0) 2(-1.635,0)
SOD523
  rect 0.6x0.7 smd: 1(0.71,0) 2(-0.71,0)
SOIC16
  rect 1.27x0.635 smd: 1(-2.477,4.445) 2(-2.477,3.175) 3(-2.477,1.905) 4(-2.477,0.635) 5(-2.477,-0.635) 6(-2.477,-1.905) 7(-2.477,-3.175) 8(-2.477,-4.445) 9(2.477,-4.445) 10(2.477,-3.175) 11(2.477,-1.905) 12(2.477,-0.635) 13(2.477,0.635) 14(2.477,1.905) 15(2.477,3.175) 16(2.477,4.445)
SOIC-8
  rect 1.092x0.508 smd: 1(-2.55,1.905) 2(-2.55,0.635) 3(-2.55,-0.635) 4(-2.55,-1.905) 5(2.55,-1.905) 6(2.55,-0.635) 7(2.55,0.635) 8(2.55,1.905)
SOP8-50-150
  rect 0.635x1.778 smd: 1(-1.905,-2.667) 2(-0.635,-2.667) 3(0.635,-2.667) 4(1.905,-2.667) 5(1.905,2.667) 6(0.635,2.667) 7(-0.635,2.667) 8(-1.905,2.667)
SOP48-20-720A
  rect 0.254x1.651 smd: 1(-5.75,-9.703) 2(-5.25,-9.703) 3(-4.75,-9.703) 4(-4.25,-9.703) 5(-3.75,-9.703) 6(-3.25,-9.703) 7(-2.75,-9.703) 8(-2.25,-9.703) 9(-1.75,-9.703) 10(-1.25,-9.703) 11(-0.75,-9.703) 12(-0.25,-9.703) 13(0.25,-9.703) 14(0.75,-9.703) 15(1.25,-9.703) 16(1.75,-9.703) 17(2.25,-9.703) 18(2.75,-9.703) 19(3.25,-9.703) 20(3.75,-9.703) 21(4.25,-9.703) 22(4.75,-9.703) 23(5.25,-9.703) 24(5.75,-9.703) 25(5.75,9.703) 26(5.25,9.703) 27(4.75,9.703) 28(4.25,9.703) 29(3.75,9.703) 30(3.25,9.703) 31(2.75,9.703) 32(2.25,9.703) 33(1.75,9.703) 34(1.25,9.703) 35(0.75,9.703) 36(0.25,9.703) 37(-0.25,9.703) 38(-0.75,9.703) 39(-1.25,9.703) 40(-1.75,9.703) 41(-2.25,9.703) 42(-2.75,9.703) 43(-3.25,9.703) 44(-3.75,9.703) 45(-4.25,9.703) 46(-4.75,9.703) 47(-5.25,9.703) 48(-5.75,9.703)
SOT23
  rect 0.508x0.432 smd: 1(-0.889,0.94) 2(-0.889,-0.965) 3(0.889,0)
SOT23-5
  rect 0.65x1.06 smd: 1(-0.95,-1.1) 2(0,-1.1) 3(0.95,-1.1) 4(0.95,1.1) 5(-0.95,1.1)
SOT23-6L
  rect 0.635x1.27 smd: 1(-0.95,-1.2) 2(0,-1.2) 3(0.95,-1.2) 4(0.95,1.2) 5(0,1.2) 6(-0.95,1.2)
SR0402
  rect 0.508x0.508 smd: 1(-0.406,0) 2(0.406,0)
SR0603
  rect 0.711x0.813 smd: 1(-0.737,0) 2(0.737,0)
SRN8-0804
  rect 0.279x0.533 smd: 1(-0.762,-0.521) 2(-0.254,-0.521) 3(0.254,-0.521) 4(0.762,-0.521) 5(0.762,0.521) 6(0.254,0.521) 7(-0.254,0.521) 8(-0.762,0.521)
SSOP28
  rect 0.432x2.261 smd: 1(-4.225,-3.378) 2(-3.575,-3.378) 3(-2.925,-3.378) 4(-2.275,-3.378) 5(-1.625,-3.378) 6(-0.975,-3.378) 7(-0.325,-3.378) 8(0.325,-3.378) 9(0.975,-3.378) 10(1.625,-3.378) 11(2.275,-3.378) 12(2.925,-3.378) 13(3.575,-3.378) 14(4.225,-3.378) 15(4.225,3.378) 16(3.575,3.378) 17(2.925,3.378) 18(2.275,3.378) 19(1.625,3.378) 20(0.975,3.378) 21(0.325,3.378) 22(-0.325,3.378) 23(-0.975,3.378) 24(-1.625,3.378) 25(-2.275,3.378) 26(-2.925,3.378) 27(-3.575,3.378) 28(-4.225,3.378)
STC3528
  rect 1.727x2.286 smd: 1(-1.499,0) 2(1.499,0)
STC7343
  rect 2.54x2.413 smd: 1(-3.429,0) 2(3.429,0)
SX2-1205
  rect 4.826x1.524 smd: 1(-4.85,0) 2(4.85,0)
WIFI_BT_R
  oval 1.6x3 smd: 1(-5,-6.2) 2(-2.2,-6.2) 3(1.3,-6.2) 4(3.8,-6.2) 5(4.3,6.2) 6(2.3,6.2)

## Nets
1V1_CORE: C3.1(A) C4.1(A) C5.1(A) C15.1(A) C16.1(A) C27.1(A) C28.1(A) C29.1(A) C30.1(A) C31.1(A) C32.1(A) C33.1(A) C36.1(A) C37.1 C175.1(A) C176.1(A) C177.1(A) C194.1(A) C195.1(A) C201.1(A) C202.1(A) C229.1(A) C230.1(A) LB4.1 LB5.1 LB7.2 LB9.1 LB12.1 LB13.1
1V2_CPU: C6.1(A) C7.1(A) C8.1(A) C20.1(A) C21.1(A) C22.1(A) C23.1(A) C24.1(A) C25.1(A) C35.1 C42.1(A) C75.1(A) C76.1(A) C137.1 C138.1 C140.1(A) C180.1(A) C181.1(A) C182.1(A) C206.1(A)
1V5: C11.1(A) C12.1(A) C13.1(A) C14.1(A) C38.1 C50.1(A) C51.1(A) C52.1(A) C53.1(A) C54.1(A) C55.1(A) C56.1(A) C57.1(A) C58.1(A) C59.1(A) C60.1(A) C61.1(A) C62.1(A) C63.1(A) C64.1(A) C65.1(A) C66.1(A) C87.1(A) C88.1(A) C89.1(A) C90.1(A) C91.1(A) C92.1(A) C93.1(A) C94.1(A) C96.1(A) C97.1(A) C100.1(A) C101.1(A) C102.1(A) C103.1(A) C104.1(A) C105.1(A) C106.1(A) C107.1(A) C108.1(A) C109.1(A) C110.1(A) C111.1(A) C112.1(A) C113.1(A) C114.1(A) C115.1(A) C116.1(A) C117.1(A) C118.1(A) C119.1(A) C120.1(A) C121.1(A) C122.1(A) C123.1(A) C124.1(A) C125.1(A) C127.1(A) C128.1(A) C130.1(A) C131.1(A) C141.1(A) C142.1(A) C143.1(A) C183.1(A) C184.1(A) C197.1(A) C198.1(A) C221.1(A) C222.1(A) C223.1(A) R42.1(A) R43.1(A) R104.2(B) R105.2(B) R108.2(B) R109.2(B) U4.A1(VDDQ1) U4.A8(VDDQ2) U4.B2(VDD1) U4.C1(VDDQ3) U4.C9(VDDQ4) U4.D2(VDDQ5) U4.D9(VDD2) U4.E9(VDDQ6) U4.F1(VDDQ7) U4.G7(VDD3) U4.H2(VDDQ8) U4.H9(VDDQ9) U4.K2(VDD4) U4.K8(VDD5) U4.N1(VDD6) U4.N9(VDD7) U4.R1(VDD8) U4.R9(VDD9) U5.A1(VDDQ1) U5.A8(VDDQ2) U5.B2(VDD1) U5.C1(VDDQ3) U5.C9(VDDQ4) U5.D2(VDDQ5) U5.D9(VDD2) U5.E9(VDDQ6) U5.F1(VDDQ7) U5.G7(VDD3) U5.H2(VDDQ8) U5.H9(VDDQ9) U5.K2(VDD4) U5.K8(VDD5) U5.N1(VDD6) U5.N9(VDD7) U5.R1(VDD8) U5.R9(VDD9)
3V3: C9.1(A) C10.1(A) C19.1(A) C26.1(A) C34.1(A) C41.1(A) C43.1(A) C45.1(A) C46.1(A) C47.1(A) C48.1(A) C49.1(A) C139.1(A) C159.1(A) C160.1(A) C161.1(A) C162.1(A) C196.1 C204.1(A) C220.1(A) C408.1(A) C2046.2 C2173.1(A) C2897.1 C2898.2 C2899.1 D49.1(A) FB3.1 FB5.1 FB1605.2 LB1.2 LB2.1 LB3.2 LB6.1 LB8.1 LB10.2 LB11.1 LB14.2 Q2.1(G) Q3.1(G) Q6.1(GATE) Q7.1(GATE) R1.2(B) R6.1(A) R19.1(A) R22.1(A) R25.1(A) R27.1(A) R29.1(A) R35.1(A) R36.1(A) R39.1(A) R44.1(A) R45.1(A) R46.1(A) R47.1(A) R48.1(A) R49.1(A) R50.1(A) R55.1(A) R75.1(A) R77.2(B) R116.1(A) R123.1(A) R124.1(A) R2290.1 R2377.2 R2378.2 R2385.1 R2917.1 R2919.1 U10.12(VCC1) U10.37(VCC2) U83.16(VCC) U92.16(DVDD) U92.24(V33)
3V3_ZWAVE: C224.2 C2174.1 FB5.2 R2291.2
5V0: C85.1(A) C168.1(A) C170.1(A) C171.1(A) C203.1(A) C2050.1 C2052.1 C2187.2 D2.1(A) J1852.18 R101.1(A) R110.1(A) R111.1(A) U1.5(IN1) U1.7(IN2) U8.5(VCC) U16.5(VCC) U26.1(IN)
5V0_USB: C164.1(A) R98.1(A) U2.5(IN1) U2.7(IN2)
5V0_USB1: C165.1(A) C173.1 R97.2(B) R98.2(B) U2.6(OUT1) U2.8(OUT2)
5V0_USB2: C169.1(A) C174.1 R96.2(B) R101.2(B) U1.6(OUT1) U1.8(OUT2)
AVDD11_USB3: C83.1(A) C84.1(A) C86.1(A) LB7.1
AVDD11_VP_SATA: C79.1(A) C80.1(A) C191.1(A) LB5.2
AVDD11_VPTX_SATA: C18.1(A) C77.1(A) C78.1(A) LB4.2
AVDD33_AC: C71.1(A) C72.1(A) C133.1(A) LB2.2
AVDD33_BAT: BT1.1 C158.2(B) C1980.2 D49.2(K) U81.8(VCC)
AVDD33_RTC: C69.1(A) LB11.2
AVDD33_SATA: C81.1(A) C82.1(A) C192.1(A) LB6.2
AVDD33_USB2: C73.1(A) C190.1(A) LB3.1
AVDD33_USB3: C70.1(A) C188.1(A) LB1.1
AVDD33_VDAC: C419.1(A) C426.1(A) C427.1(A) LB14.1
GND: BT1.2 C1.2(B) C3.2(B) C4.2(B) C5.2(B) C6.2(B) C7.2(B) C8.2(B) C9.2(B) C10.2(B) C11.2(B) C12.2(B) C13.2(B) C14.2(B) C15.2(B) C16.2(B) C17.1(A) C18.2(B) C19.2(B) C20.2(B) C21.2(B) C22.2(B) C23.2(B) C24.2(B) C25.2(B) C26.2(B) C27.2(B) C28.2(B) C29.2(B) C30.2(B) C31.2(B) C32.2(B) C33.2(B) C34.2(B) C35.2 C36.2(B) C37.2 C38.2 C39.2(B) C40.2(B) C41.2(B) C42.2(B) C43.2(B) C44.1(A) C45.2(B) C46.2(B) C47.2(B) C48.2(B) C49.2(B) C50.2(B) C51.2(B) C52.2(B) C53.2(B) C54.2(B) C55.2(B) C56.2(B) C57.2(B) C58.2(B) C59.2(B) C60.2(B) C61.2(B) C62.2(B) C63.2(B) C64.2(B) C65.2(B) C66.2(B) C67.2(B) C68.2(B) C69.2(B) C70.2(B) C71.2(B) C72.2(B) C73.2(B) C74.1(A) C75.2(B) C76.2(B) C77.2(B) C78.2(B) C79.2(B) C80.2(B) C81.2(B) C82.2(B) C83.2(B) C84.2(B) C85.2(B) C86.2(B) C87.2(B) C88.2(B) C89.2(B) C90.2(B) C91.2(B) C92.2(B) C93.2(B) C94.2(B) C95.2(B) C99.2(B) C100.2(B) C101.2(B) C102.2(B) C103.2(B) C104.2(B) C105.2(B) C106.2(B) C107.2(B) C108.2(B) C109.2(B) C110.2(B) C111.2(B) C112.2(B) C113.2(B) C114.2(B) C115.2(B) C116.2(B) C117.2(B) C118.2(B) C119.2(B) C120.2(B) C121.2(B) C122.2(B) C123.2(B) C124.2(B) C125.2(B) C126.2(B) C129.2(B) C130.2(B) C131.2(B) C133.2(B) C135.1(A) C136.1(A) C137.2 C138.2 C139.2(B) C140.2(B) C141.2(B) C142.2(B) C143.2(B) C158.1(A) C159.2(B) C160.2(B) C161.2(B) C162.2(B) C164.2(B) C165.2(B) C168.2(B) C169.2(B) C170.2(B) C171.2(B) C173.2 C174.2 C175.2(B) C176.2(B) C177.2(B) C178.2(B) C179.2(B) C180.2(B) C181.2(B) C182.2(B) C183.2(B) C184.2(B) C185.2(B) C186.1(A) C187.1(A) C188.2(B) C190.2(B) C191.2(B) C192.2(B) C193.2(B) C194.2(B) C195.2(B) C196.2 C197.2(B) C198.2(B) C199.2(B) C200.2(B) C201.2(B) C202.2(B) C203.2(B) C204.2(B) C206.2(B) C209.2(B) C210.2(B) C214.2(B) C215.2(B) C216.2(B) C217.2(B) C218.2(B) C219.2(B) C220.2(B) C221.2(B) C222.2(B) C223.2(B) C224.1 C229.2(B) C230.2(B) C408.2(B) C419.2(B) C426.2(B) C427.2(B) C430.2(B) C432.2(B) C434.2(B) C1980.1 C1993.1 C2035.1 C2036.2 C2037.2 C2038.2 C2039.1 C2040.1 C2041.1 C2044.1 C2046.1 C2049.1 C2050.2 C2051.2 C2052.2 C2053.2 C2054.2 C2096.1(A) C2097.2(B) C2173.2(B) C2174.2 C2175.1 C2176.1 C2187.1 C2896.2(B) C2897.2 C2898.1 C2899.2 ED15.2 ED16.2 ED17.2 ED18.2 ESD811.2(ANODE) ESD812.2(ANODE) FB1606.2 J21.1 J21.2 J0701.1 J0702.1 J1851.4 J1852.2 J1852.5 J1852.8 J1852.11 J1852.17 J1852.20 J1852.21 J1852.22 J1852.23 R20.2(B) R21.2(B) R26.2(B) R28.2(B) R30.2(B) R33.1(A) R34.1(A) R40.2(B) R41.2(B) R57.2(B) R58.2(B) R62.2(B) R63.2(B) R64.2(B) R66.2(B) R68.1(A) R69.1(A) R70.1(A) R71.1(A) R72.1(A) R73.1(A) R74.2(B) R76.1(A) R78.1(A) R79.1(A) R80.1(A) R81.1(A) R82.1(A) R83.2(B) R84.2(B) R96.1(A) R97.1(A) R102.1(A) R103.1(A) R106.1(A) R107.1(A) R115.1(A) R125.2(B) R126.1(A) R301.2(B) R2379.1 R2924.2(B) R2925.1 SIM1.9(NC3) SIM1.10(NC4) SIM1.11(NC1) SIM1.12(NC2) SIM1.13(NC5) SIM1.14(NC6) U1.3(GND) U2.3(GND) U4.A9(VSS1) U4.B1(VSSQ1) U4.B3(VSS2) U4.B9(VSSQ2) U4.D1(VSSQ3) U4.D8(VSSQ4) U4.E1(VSS3) U4.E2(VSSQ5) U4.E8(VSSQ6) U4.F9(VSSQ7) U4.G1(VSSQ8) U4.G8(VSS4) U4.G9(VSSQ9) U4.J2(VSS5) U4.J8(VSS6) U4.M1(VSS7) U4.M9(VSS8) U4.P1(VSS9) U4.P9(VSS10) U4.T1(VSS11) U4.T9(VSS12) U5.A9(VSS1) U5.B1(VSSQ1) U5.B3(VSS2) U5.B9(VSSQ2) U5.D1(VSSQ3) U5.D8(VSSQ4) U5.E1(VSS3) U5.E2(VSSQ5) U5.E8(VSSQ6) U5.F9(VSSQ7) U5.G1(VSSQ8) U5.G8(VSS4) U5.G9(VSSQ9) U5.J2(VSS5) U5.J8(VSS6) U5.M1(VSS7) U5.M9(VSS8) U5.P1(VSS9) U5.P9(VSS10) U5.T1(VSS11) U5.T9(VSS12) U8.2(GND) U10.13(VSS1) U10.36(VSS2) U16.2(GND) U26.2(GND) U28.4(GND1) U28.5(GND2) U81.4(VSS) U83.15(GND) U90.3(GND1) U90.8(GND2) U91.3(GND1) U91.8(GND2) U92.15(GND)
GND_FIELD SIGNAL: C2177.2 C2178.2 C2179.2 C2180.2 C2181.2 C2182.2 C2183.2 C2184.2 C2185.2 C2186.2 FB10.2 FB1606.1 R2387.2
VCC_IO: D4.1(A) Q8.1(GATE) R2922.1
VCC_WIFI: C1993.2 C2051.1 R2385.2 U26.5(FB/OUT) U28.1(VCC)
ACIN_LINEL: C132.1(A)
ACIN_LINER: C98.1(A)
ACIN_MICL: C134.1(A)
ACIN_MICR: C189.1(A)
BOOTROM_SEL: R35.2(B) R64.1(A) R86.1(A)
CVBS_OUT: R301.1(A)
DDC_SCL: ED15.1 J1852.15 Q6.3(DRAIN) R2918.2
DDC_SDA: ED16.1 J1852.16 Q7.3(DRAIN) R2920.2
DDR_A0: RN2.1 RN10.8
DDR_A0_A: RN2.8 U4.N3(A0)
DDR_A0_B: RN10.1 U5.N3(A0)
DDR_A1: RN1.1 RN6.8
DDR_A1_A: RN1.8 U4.P7(A1)
DDR_A1_B: RN6.1 U5.P7(A1)
DDR_A2: RN5.2 RN9.7
DDR_A2_A: RN5.7 U4.P3(A2)
DDR_A2_B: RN9.2 U5.P3(A2)
DDR_A3: RN3.2 RN7.7
DDR_A3_A: RN3.7 U4.N2(A3)
DDR_A3_B: RN7.2 U5.N2(A3)
DDR_A4: RN1.3 RN6.6
DDR_A4_A: RN1.6 U4.P8(A4)
DDR_A4_B: RN6.3 U5.P8(A4)
DDR_A5: RN3.3 RN7.6
DDR_A5_A: RN3.6 U4.P2(A5)
DDR_A5_B: RN7.3 U5.P2(A5)
DDR_A6: RN1.2 RN6.7
DDR_A6_A: RN1.7 U4.R8(A6)
DDR_A6_B: RN6.2 U5.R8(A6)
DDR_A7: RN3.4 RN7.5
DDR_A7_A: RN3.5 U4.R2(A7)
DDR_A7_B: RN7.4 U5.R2(A7)
DDR_A8: RN4.4 RN8.5
DDR_A8_A: RN4.5 U4.T8(A8)
DDR_A8_B: RN8.4 U5.T8(A8)
DDR_A9: RN5.4 RN9.5
DDR_A9_A: RN5.5 U4.R3(A9)
DDR_A9_B: RN9.4 U5.R3(A9)
DDR_A10: RN2.4 RN10.5
DDR_A10_A: RN2.5 U4.L7(A10/AP)
DDR_A10_B: RN10.4 U5.L7(A10/AP)
DDR_A11: RN4.3 RN8.6
DDR_A11_A: RN4.6 U4.R7(A11)
DDR_A11_B: RN8.3 U5.R7(A11)
DDR_A12: R12.1(A) R17.1(A)
DDR_A12_A: R12.2(B) U4.N7(A12/BC~)
DDR_A12_B: R17.2(B) U5.N7(A12/BC~)
DDR_A13: RN5.3 RN9.6
DDR_A13_A: RN5.6 U4.T3(A13/NC)
DDR_A13_B: RN9.3 U5.T3(A13/NC)
DDR_A14: RN4.2 RN8.7
DDR_A14_A: RN4.7 U4.T7(NC5)
DDR_A14_B: RN8.2 U5.T7(NC5)
DDR_A15: RN4.1 RN8.8
DDR_A15_A: RN4.8 U4.M7(A15/NC)
DDR_A15_B: RN8.1 U5.M7(A15/NC)
DDR_BA0: R11.1(A) R18.1(A)
DDR_BA0_A: R11.2(B) U4.M2(BA0)
DDR_BA0_B: R18.2(B) U5.M2(BA0)
DDR_BA1: RN1.4 RN6.5
DDR_BA1_A: RN1.5 U4.N8(BA1)
DDR_BA1_B: RN6.4 U5.N8(BA1)
DDR_BA2: RN3.1 RN7.8
DDR_BA2_A: RN3.8 U4.M3(BA2)
DDR_BA2_B: RN7.1 U5.M3(BA2)
DDR_CAS_N: RN2.2 RN10.7
DDR_CAS_N_A: RN2.7 U4.K3(C\A\S\)
DDR_CAS_N_B: RN10.2 U5.K3(C\A\S\)
DDR_CKE: R9.1(A) R14.1(A) R41.1(A)
DDR_CKE_A: R9.2(B) U4.K9(CKE)
DDR_CKE_B: R14.2(B) U5.K9(CKE)
DDR_CLK0_N: R3.1(A) U4.K7(C\K\)
DDR_CLK0_P: R2.2(B) U4.J7(CK)
DDR_CLK1_N: R5.1(A) U5.K7(C\K\)
DDR_CLK1_P: R4.2(B) U5.J7(CK)
DDR_CS0_N: R8.1(A)
DDR_CS0_N_A: R8.2(B) U4.L2(C\S\)
DDR_CS0_N_B: R16.2(B) U5.L2(C\S\)
DDR_CS1_N: R16.1(A)
DDR_DM0: U4.E7(LDM)
DDR_DM1: U4.D3(UDM)
DDR_DM2: U5.E7(LDM)
DDR_DM3: U5.D3(UDM)
DDR_DQ0: U4.E3(DQ0)
DDR_DQ1: U4.F7(DQ1)
DDR_DQ2: U4.F2(DQ2)
DDR_DQ3: U4.F8(DQ3)
DDR_DQ4: U4.H3(DQ4)
DDR_DQ5: U4.H8(DQ5)
DDR_DQ6: U4.G2(DQ6)
DDR_DQ7: U4.H7(DQ7)
DDR_DQ8: U4.D7(DQ8)
DDR_DQ9: U4.C3(DQ9)
DDR_DQ10: U4.C8(DQ10)
DDR_DQ11: U4.C2(DQ11)
DDR_DQ12: U4.A7(DQ12)
DDR_DQ13: U4.A2(DQ13)
DDR_DQ14: U4.B8(DQ14)
DDR_DQ15: U4.A3(DQ15)
DDR_DQ16: U5.E3(DQ0)
DDR_DQ17: U5.F7(DQ1)
DDR_DQ18: U5.F2(DQ2)
DDR_DQ19: U5.F8(DQ3)
DDR_DQ20: U5.H3(DQ4)
DDR_DQ21: U5.H8(DQ5)
DDR_DQ22: U5.G2(DQ6)
DDR_DQ23: U5.H7(DQ7)
DDR_DQ24: U5.D7(DQ8)
DDR_DQ25: U5.C3(DQ9)
DDR_DQ26: U5.C8(DQ10)
DDR_DQ27: U5.C2(DQ11)
DDR_DQ28: U5.A7(DQ12)
DDR_DQ29: U5.A2(DQ13)
DDR_DQ30: U5.B8(DQ14)
DDR_DQ31: U5.A3(DQ15)
DDR_DQS0_N: U4.G3(L\D\Q\S\)
DDR_DQS0_P: U4.F3(LDQS)
DDR_DQS1_N: U4.B7(U\D\Q\S\)
DDR_DQS1_P: U4.C7(UDQS)
DDR_DQS2_N: U5.G3(L\D\Q\S\)
DDR_DQS2_P: U5.F3(LDQS)
DDR_DQS3_N: U5.B7(U\D\Q\S\)
DDR_DQS3_P: U5.C7(UDQS)
DDR_ODT0: R7.1(A)
DDR_ODT1: R13.1(A)
DDR_ODT_A: R7.2(B) U4.K1(ODT)
DDR_ODT_B: R13.2(B) U5.K1(ODT)
DDR_RAS_N: RN2.3 RN10.6
DDR_RAS_N_A: RN2.6 U4.J3(R\A\S\)
DDR_RAS_N_B: RN10.3 U5.J3(R\A\S\)
DDR_RESET_N: RN5.1 RN9.8
DDR_RESET_N_A: C199.1(A) R42.2(B) RN5.8 U4.T2(R\S\T\)
DDR_RESET_N_B: C200.1(A) R43.2(B) RN9.1 U5.T2(R\S\T\)
DDR_WE_N: R10.1(A) R15.1(A)
DDR_WE_N_A: R10.2(B) U4.L3(W\E\)
DDR_WE_N_B: R15.2(B) U5.L3(W\E\)
EPHY0_CLK: R122.2(B)
EPHY1_CLK: R114.2(B)
GPIO1_0: R2321.1
GPIO1_6: U26.3(S\H\D\N\)
GPIO1_7: R2388.2
HDMI_CEC: Q8.2(SOURCE) R2922.2
HDMI_HOTPLUG: C2896.1(A) J1852.19 R2924.1(A)
HDMI_HPD: ED17.1
HDMI_SCL: Q6.2(SOURCE) R2917.2
HDMI_SDA: Q7.2(SOURCE) R2919.2
HDMI_TX0N: J1852.9 U91.2(IN2) U91.9(OUT2)
HDMI_TX0P: J1852.7 U91.1(IN1) U91.10(OUT1)
HDMI_TX1N: J1852.6 U90.5(IN4) U90.6(OUT4)
HDMI_TX1P: J1852.4 U90.4(IN3) U90.7(OUT3)
HDMI_TX2N: J1852.3 U90.2(IN2) U90.9(OUT2)
HDMI_TX2P: J1852.1($PIN0) U90.1(IN1) U90.10(OUT1)
HDMI_TXCN: J1852.12 U91.5(IN4) U91.6(OUT4)
HDMI_TXCP: J1852.10 U91.4(IN3) U91.7(OUT3)
HDMICEC: ED18.1 Q8.3(DRAIN) R2921.1(A) R2923.2
HOST_RST: C2044.2 R2380.2 U92.13(RESET#)
HUB-AVDD: C2038.1 C2039.2 C2040.2 C2041.2 FB3.2 R2380.1 U92.1(AVDD1) U92.5(AVDD2) U92.10(AVDD3)
HUB-X1: C2036.1 U92.6(XTAL1) X3.1
HUB-X2: C2037.1 U92.7(XTAL2) X3.2
HUB_DM1: T2.3(OUT2) U92.27(DM1)
HUB_DM2: U28.2(USB_D-) U92.2(DM2)
HUB_DM3: U92.8(DM3)
HUB_DP1: T2.2(IN2) U92.28(DP1)
HUB_DP2: U28.3(USB_D+) U92.3(DP2)
HUB_DP3: U92.9(DP3)
I2C_SCL: R120.1(A) R123.2(B) U81.6(SLC)
I2C_SCL_VGA: R110.2(B) R121.2(B) U8.3(IO_2)
I2C_SDA: R119.1(A) R124.2(B) U81.5(SDA)
I2C_SDA_VGA: R111.2(B) R118.2(B) U8.4(IO_3)
JTAG_EN: R29.2(B) R30.1(A)
JTAG_SEL: R61.1(A) R74.1(A) R75.2(B)
MDCK: R86.2(B)
NF_BOOT_PIN0/NF_REN: R45.2(B) SW1.6 U10.8(R\E\)
NF_BOOT_PIN1/NF_CLE: R44.2(B) SW1.7 U10.16(CLE)
NF_BOOT_PIN2/NF_ALE: R36.2(B) SW1.8 U10.17(ALE)
NF_BOOT_PIN3/NF_WEN: U10.18(W\E\)
NF_CSN0: R46.2(B) U10.9(C\E\)
NF_CSN1: R50.2(B) U10.10(NC7)
NF_DQ0: U10.29(IO_0)
NF_DQ1: U10.30(IO_1)
NF_DQ2: U10.31(IO_2)
NF_DQ3: U10.32(IO_3)
NF_DQ4: U10.41(IO_4)
NF_DQ5: U10.42(IO_5)
NF_DQ6: U10.43(IO_6)
NF_DQ7: U10.44(IO_7)
NF_RDY0: R47.2(B) U10.7(R/B~)
NF_RDY1: R49.2(B) U10.6(NC6)
PC_3V3: C2177.1 C2178.1 C2180.1 C2181.1 C2182.1 C2185.1 FB1605.1 R2386.2 R2389.2
PGANG: R2378.1 U92.18(PGANG)
PSELF: R2377.1 U92.17(PSELF)
RGMII0_TXCKOUT: R93.2(B)
RGMII0_TXD0: R85.2(B)
RGMII0_TXD1: R113.2(B)
RGMII0_TXD2: R112.2(B)
RGMII0_TXD3: R87.2(B)
RGMII0_TXEN: R88.2(B)
RGMII0_TXER/NF_BOOT_PIN4: R55.2(B) SW1.5
RGMII1_TXCKOUT: R92.2(B)
RGMII1_TXD0: R89.2(B)
RGMII1_TXD1: R90.2(B)
RGMII1_TXD2: R95.2(B)
RGMII1_TXD3: R94.2(B)
RGMII1_TXEN: R91.2(B)
RGMII1_TXER: R61.2(B)
RS232_RX_DBG: J0701.3 U83.13(R1IN)
RS232_RX_IOM: J0702.3 U83.8(R2IN)
RS232_TX_DBG: J0701.2 U83.14(T1OUT)
RS232_TX_IOM: J0702.2 U83.7(T2OUT)
RTC_CLKOUT: R2290.2 U81.7(MFP)
SATA_LED_N0: D7.2(B)
SATA_RXM0: C153.1(A)
SATA_RXP0: C148.1(A)
SATA_TXM0: C149.1(A)
SATA_TXP0: C150.1(A)
SFC_ADDR_MODE: R27.2(B) R28.1(A) R59.1(A)
SFC_CLK: R59.2(B)
SYS_RSTN: C1.1(A)
TEMPER_DQ: R77.1(A)
UART0_RXD: U83.12(R1OUT)
UART0_TXD: U83.11(T1IN)
UART2_RXD: U83.9(R2OUT)
UART2_TXD: U83.10(T2IN)
UART3_RXD: R2376.2
UART3_TXD: R2375.2
UIM_CLK: C2186.1 SIM1.3(C3)
UIM_DATA: C2183.1 SIM1.7(C7)
UIM_PWR: C2184.1 SIM1.1(C1)
UIM_RESET: C2179.1 SIM1.2(C2)
USB2_DM0: U92.25(DM0)
USB2_DP0: U92.26(DP0)
USB2_OVRCUR1: R22.2(B) U2.2(FLG)
USB2_PWREN1: R21.1(A) U2.1(CTL)
USB3_OVRCUR: R25.2(B) U1.2(FLG)
USB3_PWREN: R26.1(A) U1.1(CTL)
USB3_TXM: C145.1(A)
USB3_TXP: C144.1(A)
VGA_B: C214.1(A) C226.1(A) L1.1(A) R62.1(A)
VGA_B_OUT: C215.1(A) C226.2(B) L1.2(B) U16.6(IO_4)
VGA_G: C216.1(A) C227.1(A) L2.1(A) R63.1(A)
VGA_G_OUT: C217.1(A) C227.2(B) L2.2(B) U16.3(IO_2)
VGA_HS: R32.2(B) U8.6(IO_4)
VGA_R: C218.1(A) C228.1(A) L3.1(A) R66.1(A)
VGA_R_OUT: C219.1(A) C228.2(B) L3.2(B) U16.1(IO_1)
VGA_VS: R31.2(B) U8.1(IO_1)
VOU1120_DATA7/BOOT_SEL0: R19.2(B) SW2.7
VOU1120_DATA10/BOOT_SEL1: R6.2(B) SW2.8
VREFCA0: C95.1(A) C96.2(B) R103.2(B) R104.1(A) U4.M8(VREFCA)
VREFCA1: C126.1(A) C127.2(B) R107.2(B) R108.1(A) U5.M8(VREFCA)
VREFDQ0: C97.2(B) C99.1(A) R102.2(B) R105.1(A) U4.H1(VREFDQ)
VREFDQ1: C128.2(B) C129.1(A) R106.2(B) R109.1(A) U5.H1(VREFDQ)
WAN_NDISABLE: R2386.1 R2387.1 R2388.1
WLAN_DN: ESD812.1(CATHODE) T2.4(OUT1)
WLAN_DP: ESD811.1(CATHODE) T2.1(IN1)
ZWAVE_RESETN: C2035.2 J1851.3 R2291.1 R2321.2
ZWAVE_RX: J1851.1 R2375.1
ZWAVE_TX: J1851.2 R2376.1
N03984: Q3.3(D) R121.1(A)
N03996: Q3.2(S) R120.2(B)
N04000: Q2.2(S) R119.2(B)
N04020: Q2.3(D) R118.1(A)
N04090: R40.1(A)
N04094: R31.1(A)
N04098: R32.1(A)
N04102: R69.2(B) R70.2(B)
N04124: C430.1(A) C434.1(A) LB13.2
N04136: C193.1(A) C432.1(A) LB12.2
N05635: C210.1(A) U2.4(GATE)
N05743: C209.1(A) U1.4(GATE)
N05809: C150.2(B)
N05813: C149.2(B)
N05817: C148.2(B)
N05821: C153.2(B)
N05893: D7.1(A) R39.2(B)
N05909: C145.2(B)
N05913: C144.2(B)
N07397: C134.2(B) R68.2(B)
N07803: R126.2(B)
N07835: R88.1(A)
N07871: R114.1(A)
N07875: R122.1(A)
N07879: R91.1(A)
N07883: R92.1(A)
N07887: R94.1(A)
N07891: R95.1(A)
N07895: R90.1(A)
N07899: R89.1(A)
N07903: R93.1(A)
N07907: R87.1(A)
N07911: R112.1(A)
N07915: R113.1(A)
N07919: R85.1(A)
N08129: C17.2(B) R78.2(B)
N08183: C132.2(B)
N08187: C98.2(B)
N08199: R57.1(A) R58.1(A)
N08209: R125.1(A)
N08251: C189.2(B) R76.2(B)
N09322: R82.2(B) SW1.1
N09326: R81.2(B) SW1.2
N09330: R79.2(B) SW1.4
N09334: R80.2(B) SW1.3
N09338: R1.1(A)
N09342: R20.1(A)
N09370: R33.2(B) SW2.2
N09374: R34.2(B) SW2.1
N10778: R48.2(B) U10.19(W\P\)
N10822: R115.2(B) U10.25(VSS3/NC28) U10.48(VSS4/NC29)
N10832: R116.2(B) U10.34(VCC3/NC26) U10.39(VCC4/NC27)
N10912: R84.1(A)
N10916: R83.1(A)
N10920: C136.2(B) R127.1(A) X2.2
N10928: C135.2(B) R56.2(B) X2.1
N10944: R56.1(A) R127.2(B)
N10952: C44.2(B)
N10964: C74.2(B)
N12856: R73.2(B) U5.L8(ZQ)
N12964: C187.2(B) R4.1(A) R5.2(B)
N14898: R72.2(B) U4.L8(ZQ)
N15038: C186.2(B) R2.1(A) R3.2(B)
N16656: R71.2(B)
N16660: C67.1(A) C68.1(A) C185.1(A) LB10.1
N19458: C39.1(A) C178.1(A) LB9.2
N19470: C40.1(A) C179.1(A) LB8.2
N3996117: C2094.2(B) U83.1(C1+)
N3996121: C2094.1(A) U83.3(C1-)
N3996133: C2095.2(B) U83.5(C2-)
N3996137: C2095.1(A) U83.4(C2+)
N3996149: C2096.2(B) U83.2(V+)
N3996157: C2097.1(A) U83.6(V-)
N3998605: LED1.A R2389.1
N3999271: C2176.2 L14.2 U28.6(RF)
N3999303: C2175.2 J21.3 L14.1
N3999599: C2049.2 U26.4(BP)
N4000723: FB10.1 SIM1.5(C5)
N4000727: LED1.C
N4021193: C2053.1 U81.1(OSCI) Y6.2
N4021335: C2054.1 U81.2(OSCO) Y6.1
N4024172: J1852.13 R2921.2(B)
N4024314: D2.2(K) R2918.1 R2920.1
N4025010: D4.2(K) R2923.1
N4027577: R2925.2 U92.4(RREF)
N4027745: R2379.2 U92.14(TEST)

Pads without a net: ID1 1; ID2 1; ID3 1; ID4 1; ID5 1; ID6 1; J1852 14; SIM1 6; SW2 3 4 5 6; U4 J1 J9 L1 L9; U5 J1 J9 L1 L9; U10 1 2 3 4 5 11 14 15 20 21 22 23 24 26 27 28 33 35 38 40 45 46 47; U16 4; U81 3; U92 11 12 19 20 21 22 23
